# EAGLE board diybmsv4-00_panels (EAGLE 6.1), part 1 of 2
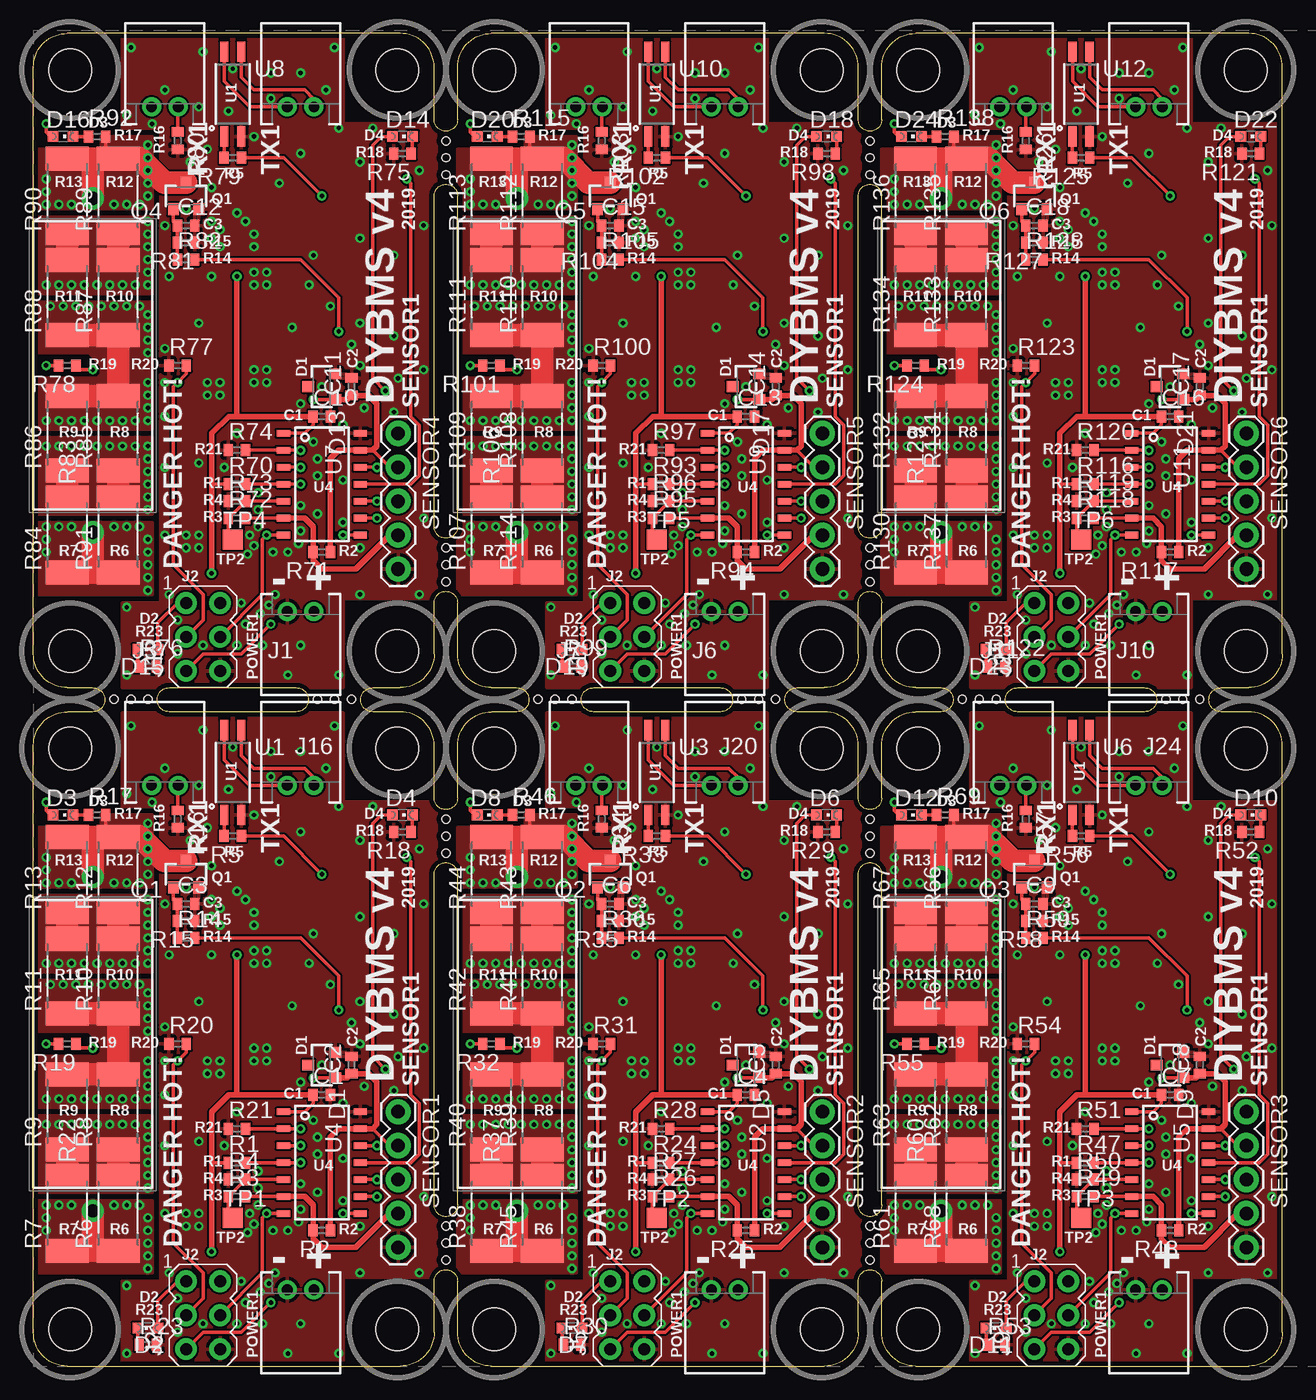
[diagram p0: board, top side]
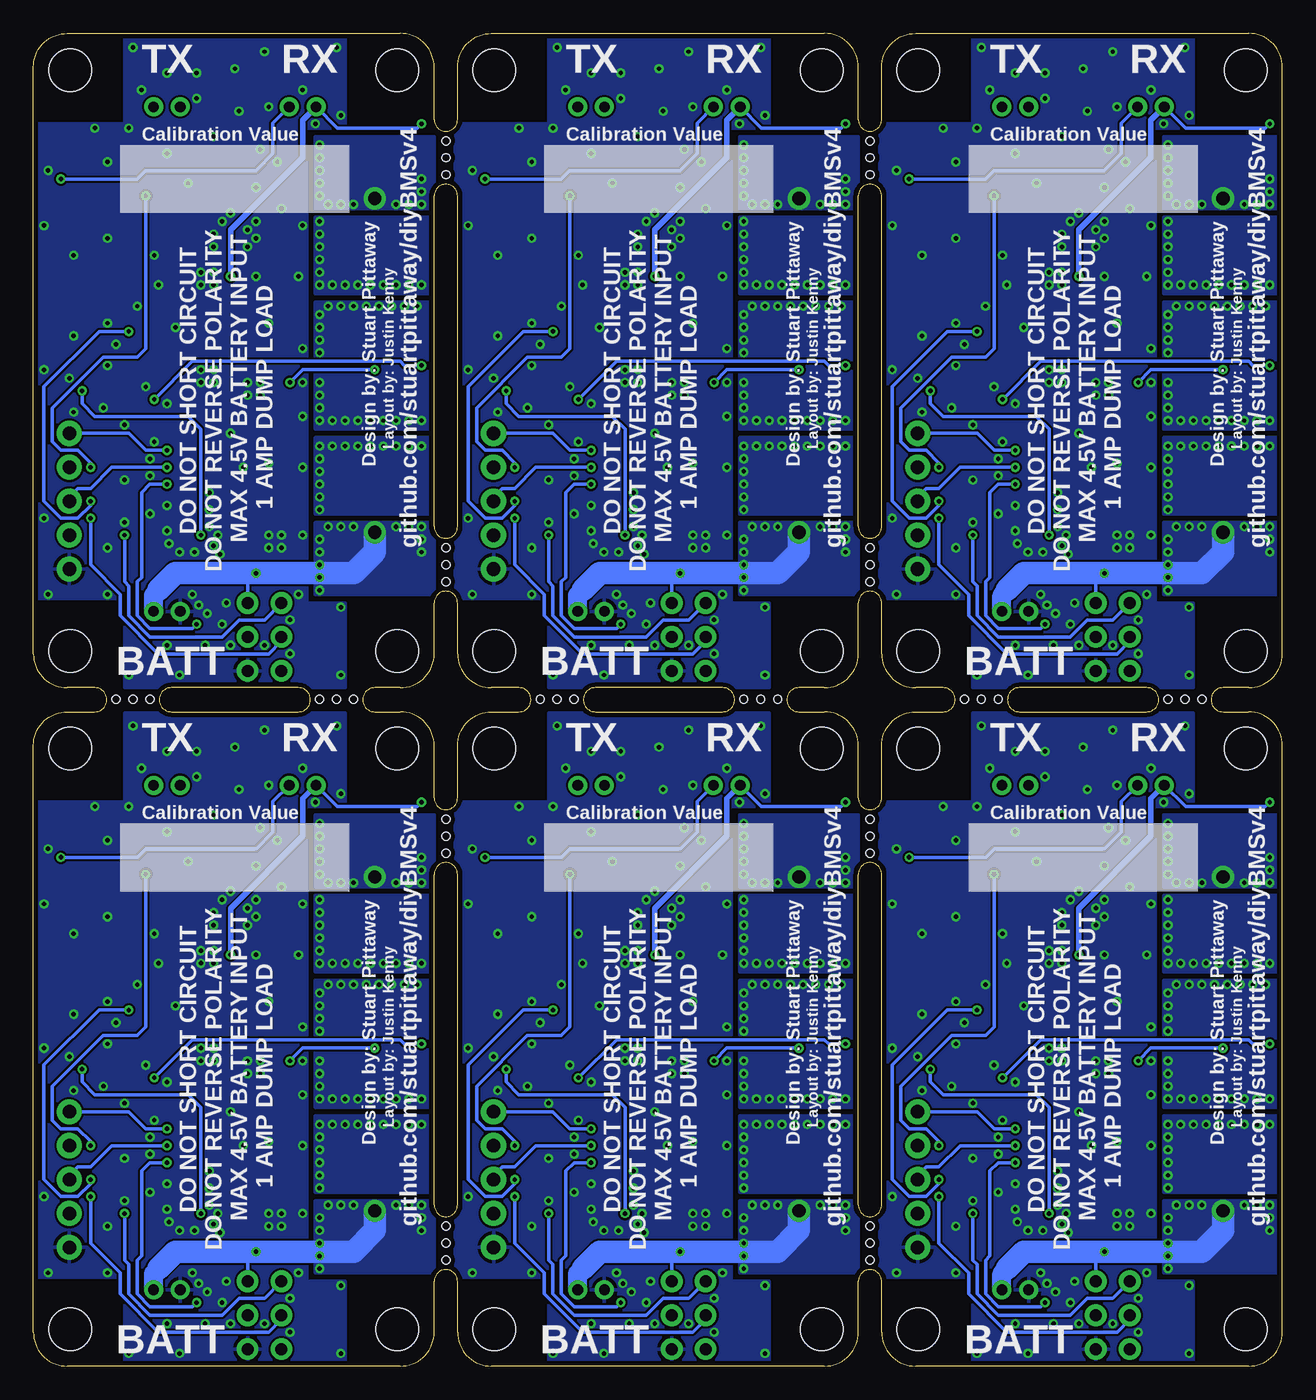
[diagram p1: board, bottom side, seen from below]

Size 93.5 x 99.8 mm. Coordinates in mm from the lower left corner, seen from the top.
Outline: 2.54,0 27.46,0 arc90 30,2.54 30,6.35 arc-180 31.75,6.35 31.75,2.54 arc90 34.29,0 59.21,0 arc90 61.75,2.54 61.75,6.35 arc-180 63.5,6.35 63.5,2.54 arc90 66.04,0 90.96,0 arc90 93.5,2.54 93.5,46.46 arc90 90.96,49 88.9,49 arc-180 88.9,50.8 90.96,50.8 arc90 93.5,53.34 93.5,97.26 arc90 90.96,99.8 66.04,99.8 arc90 63.5,97.26 63.5,93.34 arc-180 61.75,93.34 61.75,97.26 arc90 59.21,99.8 34.29,99.8 arc90 31.75,97.26 31.75,93.34 arc-180 30,93.34 30,97.26 arc90 27.46,99.8 2.54,99.8 arc90 0,97.26 0,53.34 arc90 2.54,50.8 4.45,50.8 arc-180 4.45,49 2.54,49 arc90 0,46.46 0,2.54 arc90 2.54,0
Outline: 30,12.06 30,36.83 arc-180 31.75,36.83 31.75,12.06 arc-180 30,12.06
Outline: 30,42.55 30,46.46 arc90 27.46,49 25.4,49 arc-180 25.4,50.8 27.46,50.8 arc90 30,53.34 30,57.15 arc-180 31.75,57.15 31.75,53.34 arc90 34.29,50.8 36.2,50.8 arc-180 36.2,49 34.29,49 arc90 31.75,46.46 31.75,42.55 arc-180 30,42.55
Outline: 19.68,49 10.16,49 arc-180 10.16,50.8 19.68,50.8 arc-180 19.68,49
Outline: 61.75,46.46 arc90 59.21,49 57.15,49 arc-180 57.15,50.8 59.21,50.8 arc90 61.75,53.34 61.75,57.15 arc-180 63.5,57.15 63.5,53.34 arc90 66.04,50.8 67.94,50.8 arc-180 67.94,49 66.04,49 arc90 63.5,46.46 63.5,42.55 arc-180 61.75,42.55 61.75,46.46
Outline: 61.75,12.06 61.75,36.83 arc-180 63.5,36.83 63.5,12.06 arc-180 61.75,12.06
Outline: 30,62.87 30,87.63 arc-180 31.75,87.63 31.75,62.87 arc-180 30,62.87
Outline: 61.75,62.87 61.75,87.63 arc-180 63.5,87.63 63.5,62.87 arc-180 61.75,62.87
Outline: 51.44,49 41.91,49 arc-180 41.91,50.8 51.44,50.8 arc-180 51.44,49
Outline: 83.19,49 73.66,49 arc-180 73.66,50.8 83.19,50.8 arc-180 83.19,49
Copper layers (1*16): Top 0.0356mm / dielectric 1.5011mm / Bottom 0.0356mm
Design rules: minimum track width 6mil, minimum drill 13mil, track to track 6mil, track to pad 6mil, pad to pad 6mil, via to via 6mil, smd to smd 6mil, copper to edge 15mil, drill to drill 6mil, minimum pad ring 7mil, minimum via ring 7mil, stop-mask expansion 4mil, vias tented up to drill 20mil, thermal gap 10mil
Holes 3.2 mm at 2.75,2.75 27.25,2.75 2.75,46.25 27.25,46.25 34.5,2.75 59,2.75 34.5,46.25 59,46.25 66.25,2.75 90.75,2.75 66.25,46.25 90.75,46.25 2.75,53.55 27.25,53.55 2.75,97.05 27.25,97.05 34.5,53.55 59,53.55 34.5,97.05 59,97.05 66.25,53.55 90.75,53.55 66.25,97.05 90.75,97.05
Holes 0.6 mm at 30.88,7.94 30.88,9.21 30.88,39.69 30.88,40.96 62.62,7.94 62.62,9.21 62.62,39.69 62.62,40.96 30.88,58.74 30.88,60.01 30.88,90.49 30.88,91.76 62.62,58.74 62.62,60.01 62.62,90.49 62.62,91.76 7.3,49.92 6.03,49.92 23.81,49.92 22.54,49.92 39.05,49.92 37.78,49.92 55.56,49.92 54.29,49.92 70.8,49.92 69.53,49.92 87.31,49.92 86.04,49.92 8.57,49.92 21.27,49.92 40.32,49.92 53.02,49.92 84.77,49.92 72.07,49.92 30.88,89.22 62.62,89.22 62.62,61.28 30.88,61.28 62.62,38.42 30.88,38.42 30.88,10.48 62.62,10.48

## Footprints (pad centres in the part's own frame; a part is rotated, then mirrored left to right if it is on the bottom)
C0402 = smd 0.7 x 0.9: 1 -0.65,0; 2 0.65,0
SOT23 = smd 0.8 x 0.9: 1 0.95,1; 2 -0.95,1; 3 0,-1
CHIPLED_0603 = smd 0.8 x 0.8: A 0,-0.75; C 0,0.75
S2B-PH-RA = drill 0.8 pad 1.422: 1 -1,0; 2 1,0
AVRISP = drill 0.9 pad 1.626: 1 -1.27,2.54; 2 1.27,2.54; 3 -1.27,0; 4 1.27,0; 5 -1.27,-2.54; 6 1.27,-2.54
R0402 = smd 0.7 x 0.9: 1 -0.65,0; 2 0.65,0
R2512 = smd 1.8 x 3.2: 1 -2.8,0; 2 2.8,0
R-5W-22X9P5X9P5 = drill 1 pad 1.676: 1 -12.5,0; 2 12.5,0
1X05 = drill 1.016 pad 1.88: 1 0,0; 2 2.54,0; 3 5.08,0; 4 7.62,0; 5 10.16,0
TP15SQ = smd 1.5 x 1.5: TP 0,0
4-SOIC = smd 0.61 x 1.52: 1 -0.635,-3.175; 2 0.635,-3.175; 3 0.635,3.175; 4 -0.635,3.175
14-SOIC = smd 0.5 x 1: 1 -3.81,-2.875; 2 -2.54,-2.875; 3 -1.27,-2.875; 4 0,-2.875; 5 1.27,-2.875; 6 2.54,-2.875; 7 3.81,-2.875; 8 3.81,2.875; 9 2.54,2.875; 10 1.27,2.875; 11 0,2.875; 12 -1.27,2.875; 13 -2.54,2.875; 14 -3.81,2.875

## Placement (x,y rotation side)
C1  100n  [C0402]  21.59,20.32 0 top
C2  2.2u  [C0402]  23.81,22.54 90 top
C3  10u/10V  [C0402]  11.43,34.61 0 top
C4  100n  [C0402]  53.34,20.32 0 top
C5  2.2u  [C0402]  55.56,22.54 90 top
C6  10u/10V  [C0402]  43.18,34.61 0 top
C7  100n  [C0402]  85.09,20.32 0 top
C8  2.2u  [C0402]  87.31,22.54 90 top
C9  10u/10V  [C0402]  74.93,34.61 0 top
C10  100n  [C0402]  21.59,71.12 0 top
C11  2.2u  [C0402]  23.81,73.34 90 top
C12  10u/10V  [C0402]  11.43,85.41 0 top
C13  100n  [C0402]  53.34,71.12 0 top
C14  2.2u  [C0402]  55.56,73.34 90 top
C15  10u/10V  [C0402]  43.18,85.41 0 top
C16  100n  [C0402]  85.09,71.12 0 top
C17  2.2u  [C0402]  87.31,73.34 90 top
C18  10u/10V  [C0402]  74.93,85.41 0 top
D1  LM4040  [SOT23]  21.59,22.54 270 top
D2  Blue  [CHIPLED_0603]  8.57,2.86 90 top
D3  Red  [CHIPLED_0603]  2.22,41.27 270 top
D4  Green  [CHIPLED_0603]  27.62,41.27 270 top
D5  LM4040  [SOT23]  53.34,22.54 270 top
D6  Green  [CHIPLED_0603]  59.37,41.27 270 top
D7  Blue  [CHIPLED_0603]  40.32,2.86 90 top
D8  Red  [CHIPLED_0603]  33.97,41.27 270 top
D9  LM4040  [SOT23]  85.09,22.54 270 top
D10  Green  [CHIPLED_0603]  91.12,41.27 270 top
D11  Blue  [CHIPLED_0603]  72.07,2.86 90 top
D12  Red  [CHIPLED_0603]  65.72,41.27 270 top
D13  LM4040  [SOT23]  21.59,73.34 270 top
D14  Green  [CHIPLED_0603]  27.62,92.08 270 top
D15  Blue  [CHIPLED_0603]  8.57,53.66 90 top
D16  Red  [CHIPLED_0603]  2.22,92.08 270 top
D17  LM4040  [SOT23]  53.34,73.34 270 top
D18  Green  [CHIPLED_0603]  59.37,92.08 270 top
D19  Blue  [CHIPLED_0603]  40.32,53.66 90 top
D20  Red  [CHIPLED_0603]  33.97,92.08 270 top
D21  LM4040  [SOT23]  85.09,73.34 270 top
D22  Green  [CHIPLED_0603]  91.12,92.08 270 top
D23  Blue  [CHIPLED_0603]  72.07,53.66 90 top
D24  Red  [CHIPLED_0603]  65.72,92.08 270 top
J1  M02PH  [S2B-PH-RA]  20,43.5 0 top
J2  AVRISP-6  [AVRISP]  12.7,3.81 0 top
J3  M02PH  [S2B-PH-RA]  9.84,43.5 0 top
J4  M02PH  [S2B-PH-RA]  20,5.71 180 top
J5  AVRISP-6  [AVRISP]  44.45,3.81 0 top
J6  M02PH  [S2B-PH-RA]  51.75,43.5 0 top
J7  M02PH  [S2B-PH-RA]  41.59,43.5 0 top
J8  M02PH  [S2B-PH-RA]  51.75,5.71 180 top
J9  AVRISP-6  [AVRISP]  76.2,3.81 0 top
J10  M02PH  [S2B-PH-RA]  83.5,43.5 0 top
J11  M02PH  [S2B-PH-RA]  73.34,43.5 0 top
J12  M02PH  [S2B-PH-RA]  83.5,5.71 180 top
J13  AVRISP-6  [AVRISP]  12.7,54.61 0 top
J14  M02PH  [S2B-PH-RA]  20,94.3 0 top
J15  M02PH  [S2B-PH-RA]  9.84,94.3 0 top
J16  M02PH  [S2B-PH-RA]  20,56.52 180 top
J17  AVRISP-6  [AVRISP]  44.45,54.61 0 top
J18  M02PH  [S2B-PH-RA]  51.75,94.3 0 top
J19  M02PH  [S2B-PH-RA]  41.59,94.3 0 top
J20  M02PH  [S2B-PH-RA]  51.75,56.52 180 top
J21  AVRISP-6  [AVRISP]  76.2,54.61 0 top
J22  M02PH  [S2B-PH-RA]  83.5,94.3 0 top
J23  M02PH  [S2B-PH-RA]  73.34,94.3 0 top
J24  M02PH  [S2B-PH-RA]  83.5,56.52 180 top
Q1  AO3400A  [SOT23]  11.43,36.83 180 top
Q2  AO3400A  [SOT23]  43.18,36.83 180 top
Q3  AO3400A  [SOT23]  74.93,36.83 180 top
Q4  AO3400A  [SOT23]  11.43,87.63 180 top
Q5  AO3400A  [SOT23]  43.18,87.63 180 top
Q6  AO3400A  [SOT23]  74.93,87.63 180 top
R1  10k  [R0402]  15.24,15.24 0 top
R2  1k  [R0402]  21.59,10.16 180 top
R3  475k 1%  [R0402]  15.24,12.7 0 top
R4  402k 1%  [R0402]  15.24,13.97 0 top
R5  510  [R0402]  14.92,39.69 180 top
R6  2.2  [R2512]  6.35,11.43 90 top
R7  2.2  [R2512]  2.54,11.43 90 top
R8  2.2  [R2512]  6.35,19.05 90 top
R9  2.2  [R2512]  2.54,19.05 90 top
R10  2.2  [R2512]  6.35,29.21 90 top
R11  2.2  [R2512]  2.54,29.21 90 top
R12  2.2  [R2512]  6.35,36.83 90 top
R13  2.2  [R2512]  2.54,36.83 90 top
R14  510  [R0402]  11.43,32.07 0 top
R15  47k  [R0402]  11.43,33.34 180 top
R16  4.7k  [R0402]  10.79,40.96 270 top
R17  2.2k  [R0402]  4.76,41.27 0 top
R18  2.2k  [R0402]  27.62,40.01 180 top
R19  NCP15WB473F03RC  [R0402]  2.54,24.13 180 top
R20  47k  [R0402]  10.79,24.13 0 top
R21  47k  [R0402]  15.24,17.78 0 top
R22  10 (DNI)  [R-5W-22X9P5X9P5]  4.45,24.13 90 top
R23  2.2k  [R0402]  8.57,1.59 0 top
R24  10k  [R0402]  46.99,15.24 0 top
R25  1k  [R0402]  53.34,10.16 180 top
R26  475k 1%  [R0402]  46.99,12.7 0 top
R27  402k 1%  [R0402]  46.99,13.97 0 top
R28  47k  [R0402]  46.99,17.78 0 top
R29  2.2k  [R0402]  59.37,40.01 180 top
R30  2.2k  [R0402]  40.32,1.59 0 top
R31  47k  [R0402]  42.55,24.13 0 top
R32  NCP15WB473F03RC  [R0402]  34.29,24.13 180 top
R33  510  [R0402]  46.67,39.69 180 top
R34  4.7k  [R0402]  42.55,40.96 270 top
R35  47k  [R0402]  43.18,33.34 180 top
R36  510  [R0402]  43.18,32.07 0 top
R37  10 (DNI)  [R-5W-22X9P5X9P5]  36.2,24.13 90 top
R38  2.2  [R2512]  34.29,11.43 90 top
R39  2.2  [R2512]  38.1,19.05 90 top
R40  2.2  [R2512]  34.29,19.05 90 top
R41  2.2  [R2512]  38.1,29.21 90 top
R42  2.2  [R2512]  34.29,29.21 90 top
R43  2.2  [R2512]  38.1,36.83 90 top
R44  2.2  [R2512]  34.29,36.83 90 top
R45  2.2  [R2512]  38.1,11.43 90 top
R46  2.2k  [R0402]  36.51,41.27 0 top
R47  10k  [R0402]  78.74,15.24 0 top
R48  1k  [R0402]  85.09,10.16 180 top
R49  475k 1%  [R0402]  78.74,12.7 0 top
R50  402k 1%  [R0402]  78.74,13.97 0 top
R51  47k  [R0402]  78.74,17.78 0 top
R52  2.2k  [R0402]  91.12,40.01 180 top
R53  2.2k  [R0402]  72.07,1.59 0 top
R54  47k  [R0402]  74.3,24.13 0 top
R55  NCP15WB473F03RC  [R0402]  66.04,24.13 180 top
R56  510  [R0402]  78.42,39.69 180 top
R57  4.7k  [R0402]  74.3,40.96 270 top
R58  47k  [R0402]  74.93,33.34 180 top
R59  510  [R0402]  74.93,32.07 0 top
R60  10 (DNI)  [R-5W-22X9P5X9P5]  67.94,24.13 90 top
R61  2.2  [R2512]  66.04,11.43 90 top
R62  2.2  [R2512]  69.85,19.05 90 top
R63  2.2  [R2512]  66.04,19.05 90 top
R64  2.2  [R2512]  69.85,29.21 90 top
R65  2.2  [R2512]  66.04,29.21 90 top
R66  2.2  [R2512]  69.85,36.83 90 top
R67  2.2  [R2512]  66.04,36.83 90 top
R68  2.2  [R2512]  69.85,11.43 90 top
R69  2.2k  [R0402]  68.26,41.27 0 top
R70  10k  [R0402]  15.24,66.04 0 top
R71  1k  [R0402]  21.59,60.96 180 top
R72  475k 1%  [R0402]  15.24,63.5 0 top
R73  402k 1%  [R0402]  15.24,64.77 0 top
R74  47k  [R0402]  15.24,68.58 0 top
R75  2.2k  [R0402]  27.62,90.81 180 top
R76  2.2k  [R0402]  8.57,52.39 0 top
R77  47k  [R0402]  10.79,74.93 0 top
R78  NCP15WB473F03RC  [R0402]  2.54,74.93 180 top
R79  510  [R0402]  14.92,90.49 180 top
R80  4.7k  [R0402]  10.79,91.76 270 top
R81  47k  [R0402]  11.43,84.14 180 top
R82  510  [R0402]  11.43,82.87 0 top
R83  10 (DNI)  [R-5W-22X9P5X9P5]  4.45,74.93 90 top
R84  2.2  [R2512]  2.54,62.23 90 top
R85  2.2  [R2512]  6.35,69.85 90 top
R86  2.2  [R2512]  2.54,69.85 90 top
R87  2.2  [R2512]  6.35,80.01 90 top
R88  2.2  [R2512]  2.54,80.01 90 top
R89  2.2  [R2512]  6.35,87.63 90 top
R90  2.2  [R2512]  2.54,87.63 90 top
R91  2.2  [R2512]  6.35,62.23 90 top
R92  2.2k  [R0402]  4.76,92.08 0 top
R93  10k  [R0402]  46.99,66.04 0 top
R94  1k  [R0402]  53.34,60.96 180 top
R95  475k 1%  [R0402]  46.99,63.5 0 top
R96  402k 1%  [R0402]  46.99,64.77 0 top
R97  47k  [R0402]  46.99,68.58 0 top
R98  2.2k  [R0402]  59.37,90.81 180 top
R99  2.2k  [R0402]  40.32,52.39 0 top
R100  47k  [R0402]  42.55,74.93 0 top
R101  NCP15WB473F03RC  [R0402]  34.29,74.93 180 top
R102  510  [R0402]  46.67,90.49 180 top
R103  4.7k  [R0402]  42.55,91.76 270 top
R104  47k  [R0402]  43.18,84.14 180 top
R105  510  [R0402]  43.18,82.87 0 top
R106  10 (DNI)  [R-5W-22X9P5X9P5]  36.2,74.93 90 top
R107  2.2  [R2512]  34.29,62.23 90 top
R108  2.2  [R2512]  38.1,69.85 90 top
R109  2.2  [R2512]  34.29,69.85 90 top
R110  2.2  [R2512]  38.1,80.01 90 top
R111  2.2  [R2512]  34.29,80.01 90 top
R112  2.2  [R2512]  38.1,87.63 90 top
R113  2.2  [R2512]  34.29,87.63 90 top
R114  2.2  [R2512]  38.1,62.23 90 top
R115  2.2k  [R0402]  36.51,92.08 0 top
R116  10k  [R0402]  78.74,66.04 0 top
R117  1k  [R0402]  85.09,60.96 180 top
R118  475k 1%  [R0402]  78.74,63.5 0 top
R119  402k 1%  [R0402]  78.74,64.77 0 top
R120  47k  [R0402]  78.74,68.58 0 top
R121  2.2k  [R0402]  91.12,90.81 180 top
R122  2.2k  [R0402]  72.07,52.39 0 top
R123  47k  [R0402]  74.3,74.93 0 top
R124  NCP15WB473F03RC  [R0402]  66.04,74.93 180 top
R125  510  [R0402]  78.42,90.49 180 top
R126  4.7k  [R0402]  74.3,91.76 270 top
R127  47k  [R0402]  74.93,84.14 180 top
R128  510  [R0402]  74.93,82.87 0 top
R129  10 (DNI)  [R-5W-22X9P5X9P5]  67.94,74.93 90 top
R130  2.2  [R2512]  66.04,62.23 90 top
R131  2.2  [R2512]  69.85,69.85 90 top
R132  2.2  [R2512]  66.04,69.85 90 top
R133  2.2  [R2512]  69.85,80.01 90 top
R134  2.2  [R2512]  66.04,80.01 90 top
R135  2.2  [R2512]  69.85,87.63 90 top
R136  2.2  [R2512]  66.04,87.63 90 top
R137  2.2  [R2512]  69.85,62.23 90 top
R138  2.2k  [R0402]  68.26,92.08 0 top
SENSOR1  [1X05]  27.3,19.05 270 top
SENSOR2  [1X05]  59.05,19.05 270 top
SENSOR3  [1X05]  90.81,19.05 270 top
SENSOR4  [1X05]  27.3,69.85 270 top
SENSOR5  [1X05]  59.05,69.85 270 top
SENSOR6  [1X05]  90.81,69.85 270 top
TP1  TPTP15SQ  [TP15SQ]  14.92,11.11 0 top
TP2  TPTP15SQ  [TP15SQ]  46.67,11.11 0 top
TP3  TPTP15SQ  [TP15SQ]  78.42,11.11 0 top
TP4  TPTP15SQ  [TP15SQ]  14.92,61.91 0 top
TP5  TPTP15SQ  [TP15SQ]  46.67,61.91 0 top
TP6  TPTP15SQ  [TP15SQ]  78.42,61.91 0 top
U1  HMHA2801  [4-SOIC]  14.92,44.45 0 top
U2  ATTINY841  [14-SOIC]  53.34,15.24 270 top
U3  HMHA2801  [4-SOIC]  46.67,44.45 0 top
U4  ATTINY841  [14-SOIC]  21.59,15.24 270 top
U5  ATTINY841  [14-SOIC]  85.09,15.24 270 top
U6  HMHA2801  [4-SOIC]  78.42,44.45 0 top
U7  ATTINY841  [14-SOIC]  21.59,66.04 270 top
U8  HMHA2801  [4-SOIC]  14.92,95.25 0 top
U9  ATTINY841  [14-SOIC]  53.34,66.04 270 top
U10  HMHA2801  [4-SOIC]  46.67,95.25 0 top
U11  ATTINY841  [14-SOIC]  85.09,66.04 270 top
U12  HMHA2801  [4-SOIC]  78.42,95.25 0 top

## Library data of the parts
C1-C18 R1-R21 R23-R36 R38-R59 R61-R82 R84-R105 R107-R128 R130-R138 = resistor
D1 D5 D9 D13 D17 D21 J1 J3 J4 J6-J8 J10-J12 J14-J16 J18-J20 J22-J24 Q1-Q6 R22 R37 R60 R83 R106 R129 U1-U12 = custom
D2-D4 D6-D8 D10-D12 D14-D16 D18-D20 D22-D24 = led
J2 J5 J9 J13 J17 J21 = adafruit
SENSOR1-SENSOR6 = SparkFun
TP1-TP6 = testpad

## Nets
2_VOLT: C2.1 D1.1 R2.1 R19.2 SENSOR1.2 U4.13
2_VOLT1: C5.1 D5.1 R25.1 R32.2 SENSOR2.2 U2.13
2_VOLT2: C8.1 D9.1 R48.1 R55.2 SENSOR3.2 U5.13
2_VOLT3: C11.1 D13.1 R71.1 R78.2 SENSOR4.2 U7.13
2_VOLT4: C14.1 D17.1 R94.1 R101.2 SENSOR5.2 U9.13
2_VOLT5: C17.1 D21.1 R117.1 R124.2 SENSOR6.2 U11.13
DLLED: D3.C R17.1
DLLED1: D8.C R46.1
DLLED2: D12.C R69.1
DLLED3: D16.C R92.1
DLLED4: D20.C R115.1
DLLED5: D24.C R138.1
DRAIN: Q1.3 R12.2 R13.2 R17.2 R22.2
DRAIN1: Q2.3 R37.2 R43.2 R44.2 R46.2
DRAIN2: Q3.3 R60.2 R66.2 R67.2 R69.2
DRAIN3: Q4.3 R83.2 R89.2 R90.2 R92.2
DRAIN4: Q5.3 R106.2 R112.2 R113.2 R115.2
DRAIN5: Q6.3 R129.2 R135.2 R136.2 R138.2
DUMP_LOAD_ENABLE: R14.2 U4.10
DUMP_LOAD_ENABLE1: R36.2 U2.10
DUMP_LOAD_ENABLE2: R59.2 U5.10
DUMP_LOAD_ENABLE3: R82.2 U7.10
DUMP_LOAD_ENABLE4: R105.2 U9.10
DUMP_LOAD_ENABLE5: R128.2 U11.10
ENABLE: R2.2 R3.2 SENSOR1.4 U4.6
ENABLE1: R25.2 R26.2 SENSOR2.4 U2.6
ENABLE2: R48.2 R49.2 SENSOR3.4 U5.6
ENABLE3: R71.2 R72.2 SENSOR4.4 U7.6
ENABLE4: R94.2 R95.2 SENSOR5.4 U9.6
ENABLE5: R117.2 R118.2 SENSOR6.4 U11.6
GATE: C3.1 Q1.1 R14.1 R15.2
GATE1: C6.1 Q2.1 R35.2 R36.1
GATE2: C9.1 Q3.1 R58.2 R59.1
GATE3: C12.1 Q4.1 R81.2 R82.1
GATE4: C15.1 Q5.1 R104.2 R105.1
GATE5: C18.1 Q6.1 R127.2 R128.1
GND: C1.2 C2.2 C3.2 D1.2 J2.6 J4.2 Q1.2 R4.1 R15.1 R16.2 R18.2 R20.1 R21.1 R23.2 SENSOR1.5 U1.2 U4.14
GND1: C4.2 C5.2 C6.2 D5.2 J5.6 J8.2 Q2.2 R27.1 R28.1 R29.2 R30.2 R31.1 R34.2 R35.1 SENSOR2.5 U2.14 U3.2
GND2: C7.2 C8.2 C9.2 D9.2 J9.6 J12.2 Q3.2 R50.1 R51.1 R52.2 R53.2 R54.1 R57.2 R58.1 SENSOR3.5 U5.14 U6.2
GND3: C10.2 C11.2 C12.2 D13.2 J13.6 J16.2 Q4.2 R73.1 R74.1 R75.2 R76.2 R77.1 R80.2 R81.1 SENSOR4.5 U7.14 U8.2
GND4: C13.2 C14.2 C15.2 D17.2 J17.6 J20.2 Q5.2 R96.1 R97.1 R98.2 R99.2 R100.1 R103.2 R104.1 SENSOR5.5 U9.14 U10.2
GND5: C16.2 C17.2 C18.2 D21.2 J21.6 J24.2 Q6.2 R119.1 R120.1 R121.2 R122.2 R123.1 R126.2 R127.1 SENSOR6.5 U11.14 U12.2
MISO: D2.A J2.1 U4.8
MISO1: D7.A J5.1 U2.8
MISO2: D11.A J9.1 U5.8
MISO3: D15.A J13.1 U7.8
MISO4: D19.A J17.1 U9.8
MISO5: D23.A J21.1 U11.8
MOSI: D4.A J2.4 U4.7
MOSI1: D6.A J5.4 U2.7
MOSI2: D10.A J9.4 U5.7
MOSI3: D14.A J13.4 U7.7
MOSI4: D18.A J17.4 U9.7
MOSI5: D22.A J21.4 U11.7
N$1: J1.1 U1.4
N$2: J1.2 U1.3
N$3: D4.C R18.1
N$4: D2.C R23.1
N$5: R5.2 U1.1
N$6: D6.C R29.1
N$7: D7.C R30.1
N$8: J6.1 U3.4
N$9: J6.2 U3.3
N$10: R33.2 U3.1
N$11: D10.C R52.1
N$12: D11.C R53.1
N$13: J10.1 U6.4
N$14: J10.2 U6.3
N$15: R56.2 U6.1
N$16: D14.C R75.1
N$17: D15.C R76.1
N$18: J14.1 U8.4
N$19: J14.2 U8.3
N$20: R79.2 U8.1
N$21: D18.C R98.1
N$22: D19.C R99.1
N$23: J18.1 U10.4
N$24: J18.2 U10.3
N$25: R102.2 U10.1
N$26: D22.C R121.1
N$27: D23.C R122.1
N$28: J22.1 U12.4
N$29: J22.2 U12.3
N$30: R125.2 U12.1
PB0: R21.2 SENSOR1.1 U4.2
PB1: SENSOR1.3 U4.3
PB2: R3.1 R4.2 TP1.TP U4.5
PB3: R26.1 R27.2 TP2.TP U2.5
PB4: R28.2 SENSOR2.1 U2.2
PB5: SENSOR2.3 U2.3
PB6: R49.1 R50.2 TP3.TP U5.5
PB7: R51.2 SENSOR3.1 U5.2
PB8: SENSOR3.3 U5.3
PB9: R72.1 R73.2 TP4.TP U7.5
PB10: R74.2 SENSOR4.1 U7.2
PB11: SENSOR4.3 U7.3
PB12: R95.1 R96.2 TP5.TP U9.5
PB13: R97.2 SENSOR5.1 U9.2
PB14: SENSOR5.3 U9.3
PB15: R118.1 R119.2 TP6.TP U11.5
PB16: R120.2 SENSOR6.1 U11.2
PB17: SENSOR6.3 U11.3
R1: R39.2 R40.2 R41.1 R42.1
R2: R41.2 R42.2 R43.1 R44.1
R3: R38.2 R39.1 R40.1 R45.2
R4: R62.2 R63.2 R64.1 R65.1
R5: R64.2 R65.2 R66.1 R67.1
R6: R61.2 R62.1 R63.1 R68.2
R7: R85.2 R86.2 R87.1 R88.1
R8: R87.2 R88.2 R89.1 R90.1
R9: R84.2 R85.1 R86.1 R91.2
R10: R108.2 R109.2 R110.1 R111.1
R11: R110.2 R111.2 R112.1 R113.1
R12: R107.2 R108.1 R109.1 R114.2
R13: R131.2 R132.2 R133.1 R134.1
R14: R133.2 R134.2 R135.1 R136.1
R15: R130.2 R131.1 R132.1 R137.2
R6789: R6.2 R7.2 R8.1 R9.1
R891011: R8.2 R9.2 R10.1 R11.1
R10111213: R10.2 R11.2 R12.1 R13.1
RST: J2.5 R1.2 U4.4
RST1: J5.5 R24.2 U2.4
RST2: J9.5 R47.2 U5.4
RST3: J13.5 R70.2 U7.4
RST4: J17.5 R93.2 U9.4
RST5: J21.5 R116.2 U11.4
RXD0: J3.2 R16.1 U4.11
RXD1: J7.2 R34.1 U2.11
RXD2: J11.2 R57.1 U5.11
RXD3: J15.2 R80.1 U7.11
RXD4: J19.2 R103.1 U9.11
RXD5: J23.2 R126.1 U11.11
SCK: J2.3 R19.1 R20.2 U4.9
SCK1: J5.3 R31.2 R32.1 U2.9
SCK2: J9.3 R54.2 R55.1 U5.9
SCK3: J13.3 R77.2 R78.1 U7.9
SCK4: J17.3 R100.2 R101.1 U9.9
SCK5: J21.3 R123.2 R124.1 U11.9
TXD0: R5.1 U4.12
TXD1: R33.1 U2.12
TXD2: R56.1 U5.12
TXD3: R79.1 U7.12
TXD4: R102.1 U9.12
TXD5: R125.1 U11.12
VCC: C1.1 D3.A J2.2 J3.1 J4.1 R1.1 R6.1 R7.1 R22.1 U4.1
VCC1: C4.1 D8.A J5.2 J7.1 J8.1 R24.1 R37.1 R38.1 R45.1 U2.1
VCC2: C7.1 D12.A J9.2 J11.1 J12.1 R47.1 R60.1 R61.1 R68.1 U5.1
VCC3: C10.1 D16.A J13.2 J15.1 J16.1 R70.1 R83.1 R84.1 R91.1 U7.1
VCC4: C13.1 D20.A J17.2 J19.1 J20.1 R93.1 R106.1 R107.1 R114.1 U9.1
VCC5: C16.1 D24.A J21.2 J23.1 J24.1 R116.1 R129.1 R130.1 R137.1 U11.1